# EAGLE board 217_ambientlight (EAGLE 7.6.0)
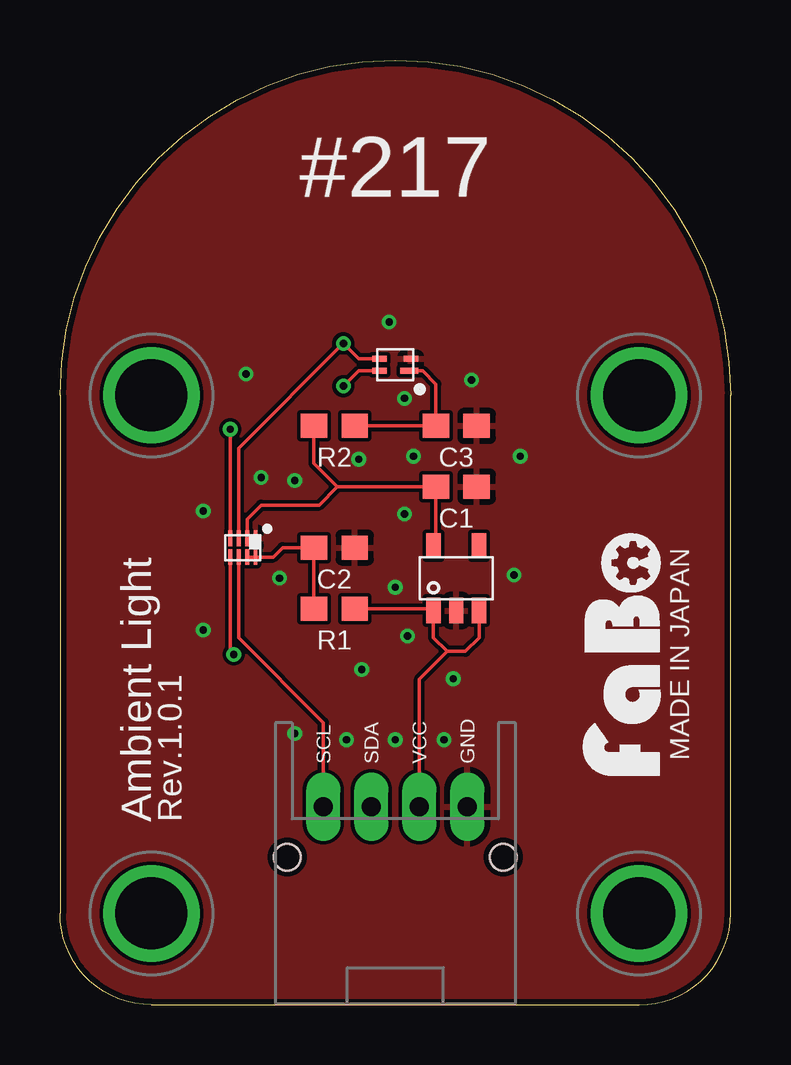
[diagram p0: board, top side]
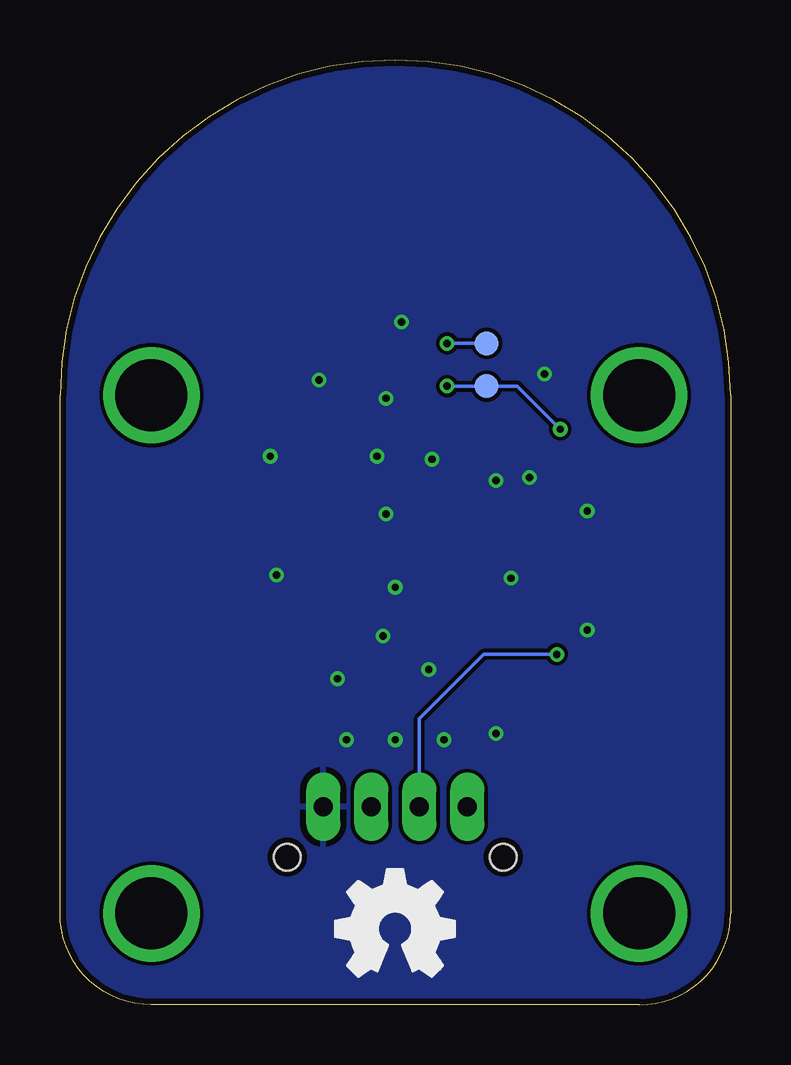
[diagram p1: board, bottom side, seen from below]

Size 27.94 x 39.37 mm. Coordinates in mm from the lower left corner, seen from the top.
Copper layers (1*16): Top 0.035mm / dielectric 1.5mm / Bottom 0.035mm
Design rules "SeeedStudio_2layer_DRU_no_angle_20140221": minimum track width 6mil, minimum drill 12mil, track to track 6mil, track to pad 6mil, pad to pad 6mil, via to via 6mil, smd to smd 0mil, copper to edge 10mil, drill to drill 10mil, minimum pad ring 10mil, minimum via ring 6mil, stop-mask expansion 2mil, vias tented up to drill 100mil, thermal gap 10mil

## Footprints (pad centres in the part's own frame; a part is rotated, then mirrored left to right if it is on the bottom)
0603 = smd 1.1 x 1: 1 -0.85,0; 2 0.85,0
TI-LP2985 = smd 0.6 x 1.05: 1 -0.95,-1.35; 2 0,-1.35; 3 0.95,-1.35; 4 0.95,1.35; 5 -0.95,1.35
X2SON = smd 0.2 x 0.65: 1 -0.525,-0.395; 2 -0.175,-0.395; 3 0.175,-0.395; 4 0.525,-0.395; 5 0.525,0.395; 6 0.175,0.395; 7 -0.175,0.395; 8 -0.525,0.395
INTERSIL-ISL29034 = smd 0.75 x 0.25: 1 -0.575,0.25 | smd 0.6 x 0.25: 2 -0.65,-0.25; 3 0.65,-0.25; 4 0.65,0.25
FABO_BRICK_I2C = drill 0.8 pad 1.422 long: GND 3,-10.795; SCL -3,-10.795; SDA -1,-10.795; VCC 1,-10.795 | drill 3 pad 3.81: P$1 -10.16,6.35; P$2 10.16,6.35; P$3 -10.16,-15.24; P$4 10.16,-15.24 | hole 1.1: -4.5,-12.895; 4.5,-12.895
TP-10 = smd 1 x 1: 1 0,0

## Placement (x,y rotation side)
C1  1uF  [0603]  16.51,21.59 180 top
C2  0.1uF  [0603]  11.43,19.05 180 top
C3  1uF  [0603]  16.51,24.13 180 top
IC1  [TI-LP2985]  16.51,17.78 0 top
IC2  [X2SON]  7.62,19.05 180 top
IC3  [INTERSIL-ISL29034]  13.97,26.67 180 top
J1  [FABO_BRICK_I2C]  13.97,19.05 0 top
R1  200k  [0603]  11.43,16.51 0 top
R2  100  [0603]  11.43,24.13 180 top
TP1  [TP-10]  10.16,25.78 0 bottom
TP2  [TP-10]  10.16,27.56 0 bottom
U$2  [LOGO_OSHW_M_BOTTOM]  13.97,3.17 0 top
U$3  [LOGO_FABO_MS]  25.4,14.61 90 top

## Library data of the parts
C1-C3 = FaBo-Capacitor
IC1 TP1 TP2 = FaBo-Supply
IC2 = FaBo-LevelTranslator
IC3 = FaBo-Mems
J1 = FaBo-Template
R1 R2 = FaBo-Resistors
U$2 U$3 = FaBo-etc

## Nets
3V3: C1.2 IC1.5 IC2.2 R2.2
5V: IC1.1 IC1.3 J1.VCC R1.2
GND: C1.1 C2.1 C3.1 IC1.2 IC2.1 IC3.2 J1.GND
N$1: C2.2 IC2.7 IC2.8 R1.1
SCL: IC2.3 IC3.3 TP2.1
SCL_HV: IC2.6 J1.SCL
SDA: IC2.4 IC3.4 TP1.1
SDA_HV: IC2.5 J1.SDA
VCC: C3.2 IC3.1 R2.1

## Tracks (layer width: path | path; a pad name or v marks a point on that pad's centre or on a via)
3V3
  Top 0.152: IC1.5 15.66,19.13 C1.2 11.56,21.59 | 11.56,21.59 10.58,22.57 R2.2 | IC2.2 7.79,20.24 8.38,20.83 10.79,20.83 11.56,21.59
5V
  Top 0.152: 16.13,14.73 15.56,15.3 IC1.1 15.48,16.51 R1.2 | IC1.3 17.46,15.3 16.89,14.73 16.13,14.73 | J1.VCC 14.97,13.57 16.13,14.73
GND  (via drill 0.3)
  other vias: 8.38,21.97 9.78,21.84 12.45,22.73 14.73,22.86 14.35,25.27 14.35,20.45 9.14,17.78 13.97,17.4 14.48,15.37 9.78,11.3 12.57,13.97 13.97,11.05 11.94,11.05 16,11.05 16.38,13.59 5.97,15.62 18.92,17.91 5.97,20.57 7.75,26.29 17.14,26.04 19.18,22.86 13.72,28.45
  pour Bottom: 0,0 27.94,0 27.94,39.37 0,39.37
  pour Top: 0,0 27.94,0 27.94,39.37 0,39.37
N$1
  Top 0.152: R1.1 C2.2 9.27,19.05 8.88,18.66 IC2.8 IC2.7
SCL  (via drill 0.3)
  Top 0.152: IC3.3 12.45,26.92 v11.81,27.56 7.45,23.19 IC2.3
  Bottom 0.152: v11.81,27.56 TP2.1
SCL_HV
  Top 0.152: IC2.6 7.45,15.29 10.97,11.76 J1.SCL
SDA  (via drill 0.3)
  Top 0.152: IC3.4 12.45,26.42 v11.81,25.78 | IC2.4 v7.09,23.99
  Bottom 0.152: v11.81,25.78 TP1.1 8.89,25.78 v7.09,23.99
SDA_HV  (via drill 0.3)
  Top 0.152: IC2.5 7.09,14.75 v7.24,14.61
  Bottom 0.152: v7.24,14.61 10.29,14.61 12.97,11.92 J1.SDA
VCC
  Top 0.152: R2.1 C3.2 15.66,25.87 15.11,26.42 IC3.1

## Text on the board
tPlace: #217 | MADE IN JAPAN | Ambient Light | Rev.1.0.1